# Altium PCB PCB_TechDemo.PcbDoc (part 1 of 2)
Units mm, origin at the board's own origin, x right, y up, seen from the top; angles counter-clockwise.
Board outline 152.4 x 101.6 mm, 2 copper layers (Top Layer, Bottom Layer); 203 components, 210 nets, 892 pads, 0 vias.
Unrouted connection lines stored in the file: 608.
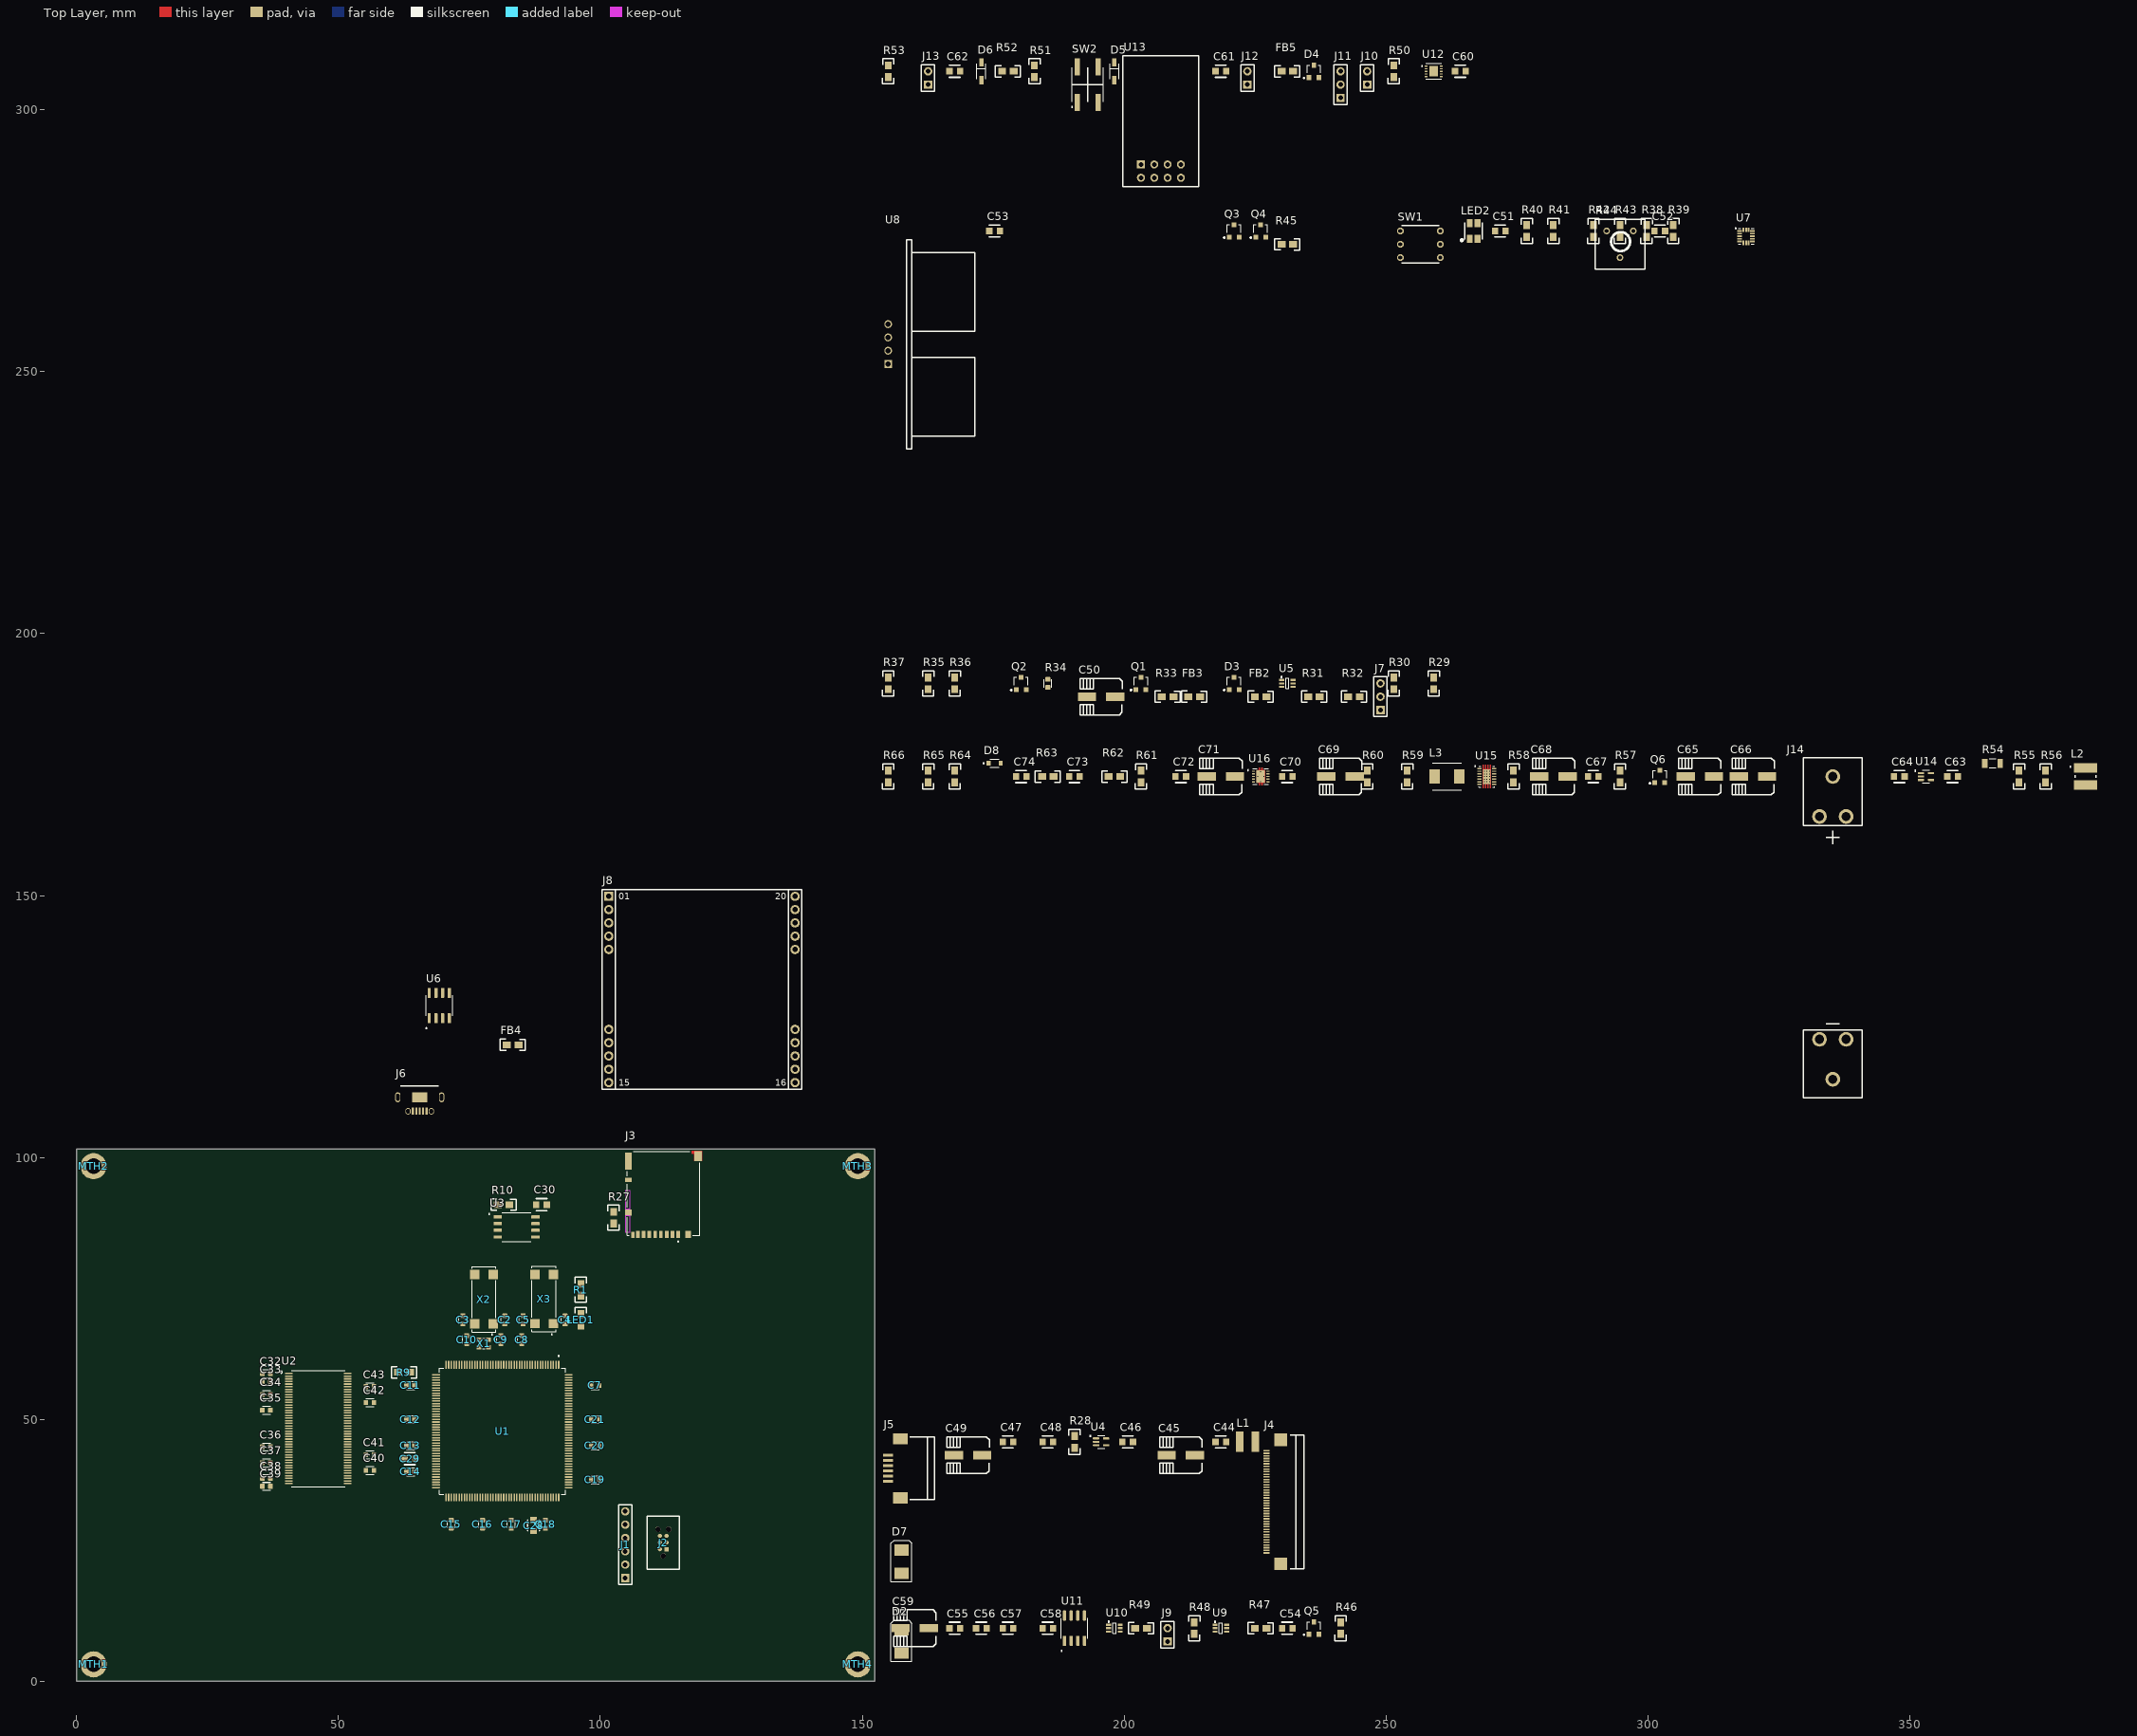
[diagram p0: Top Layer view]
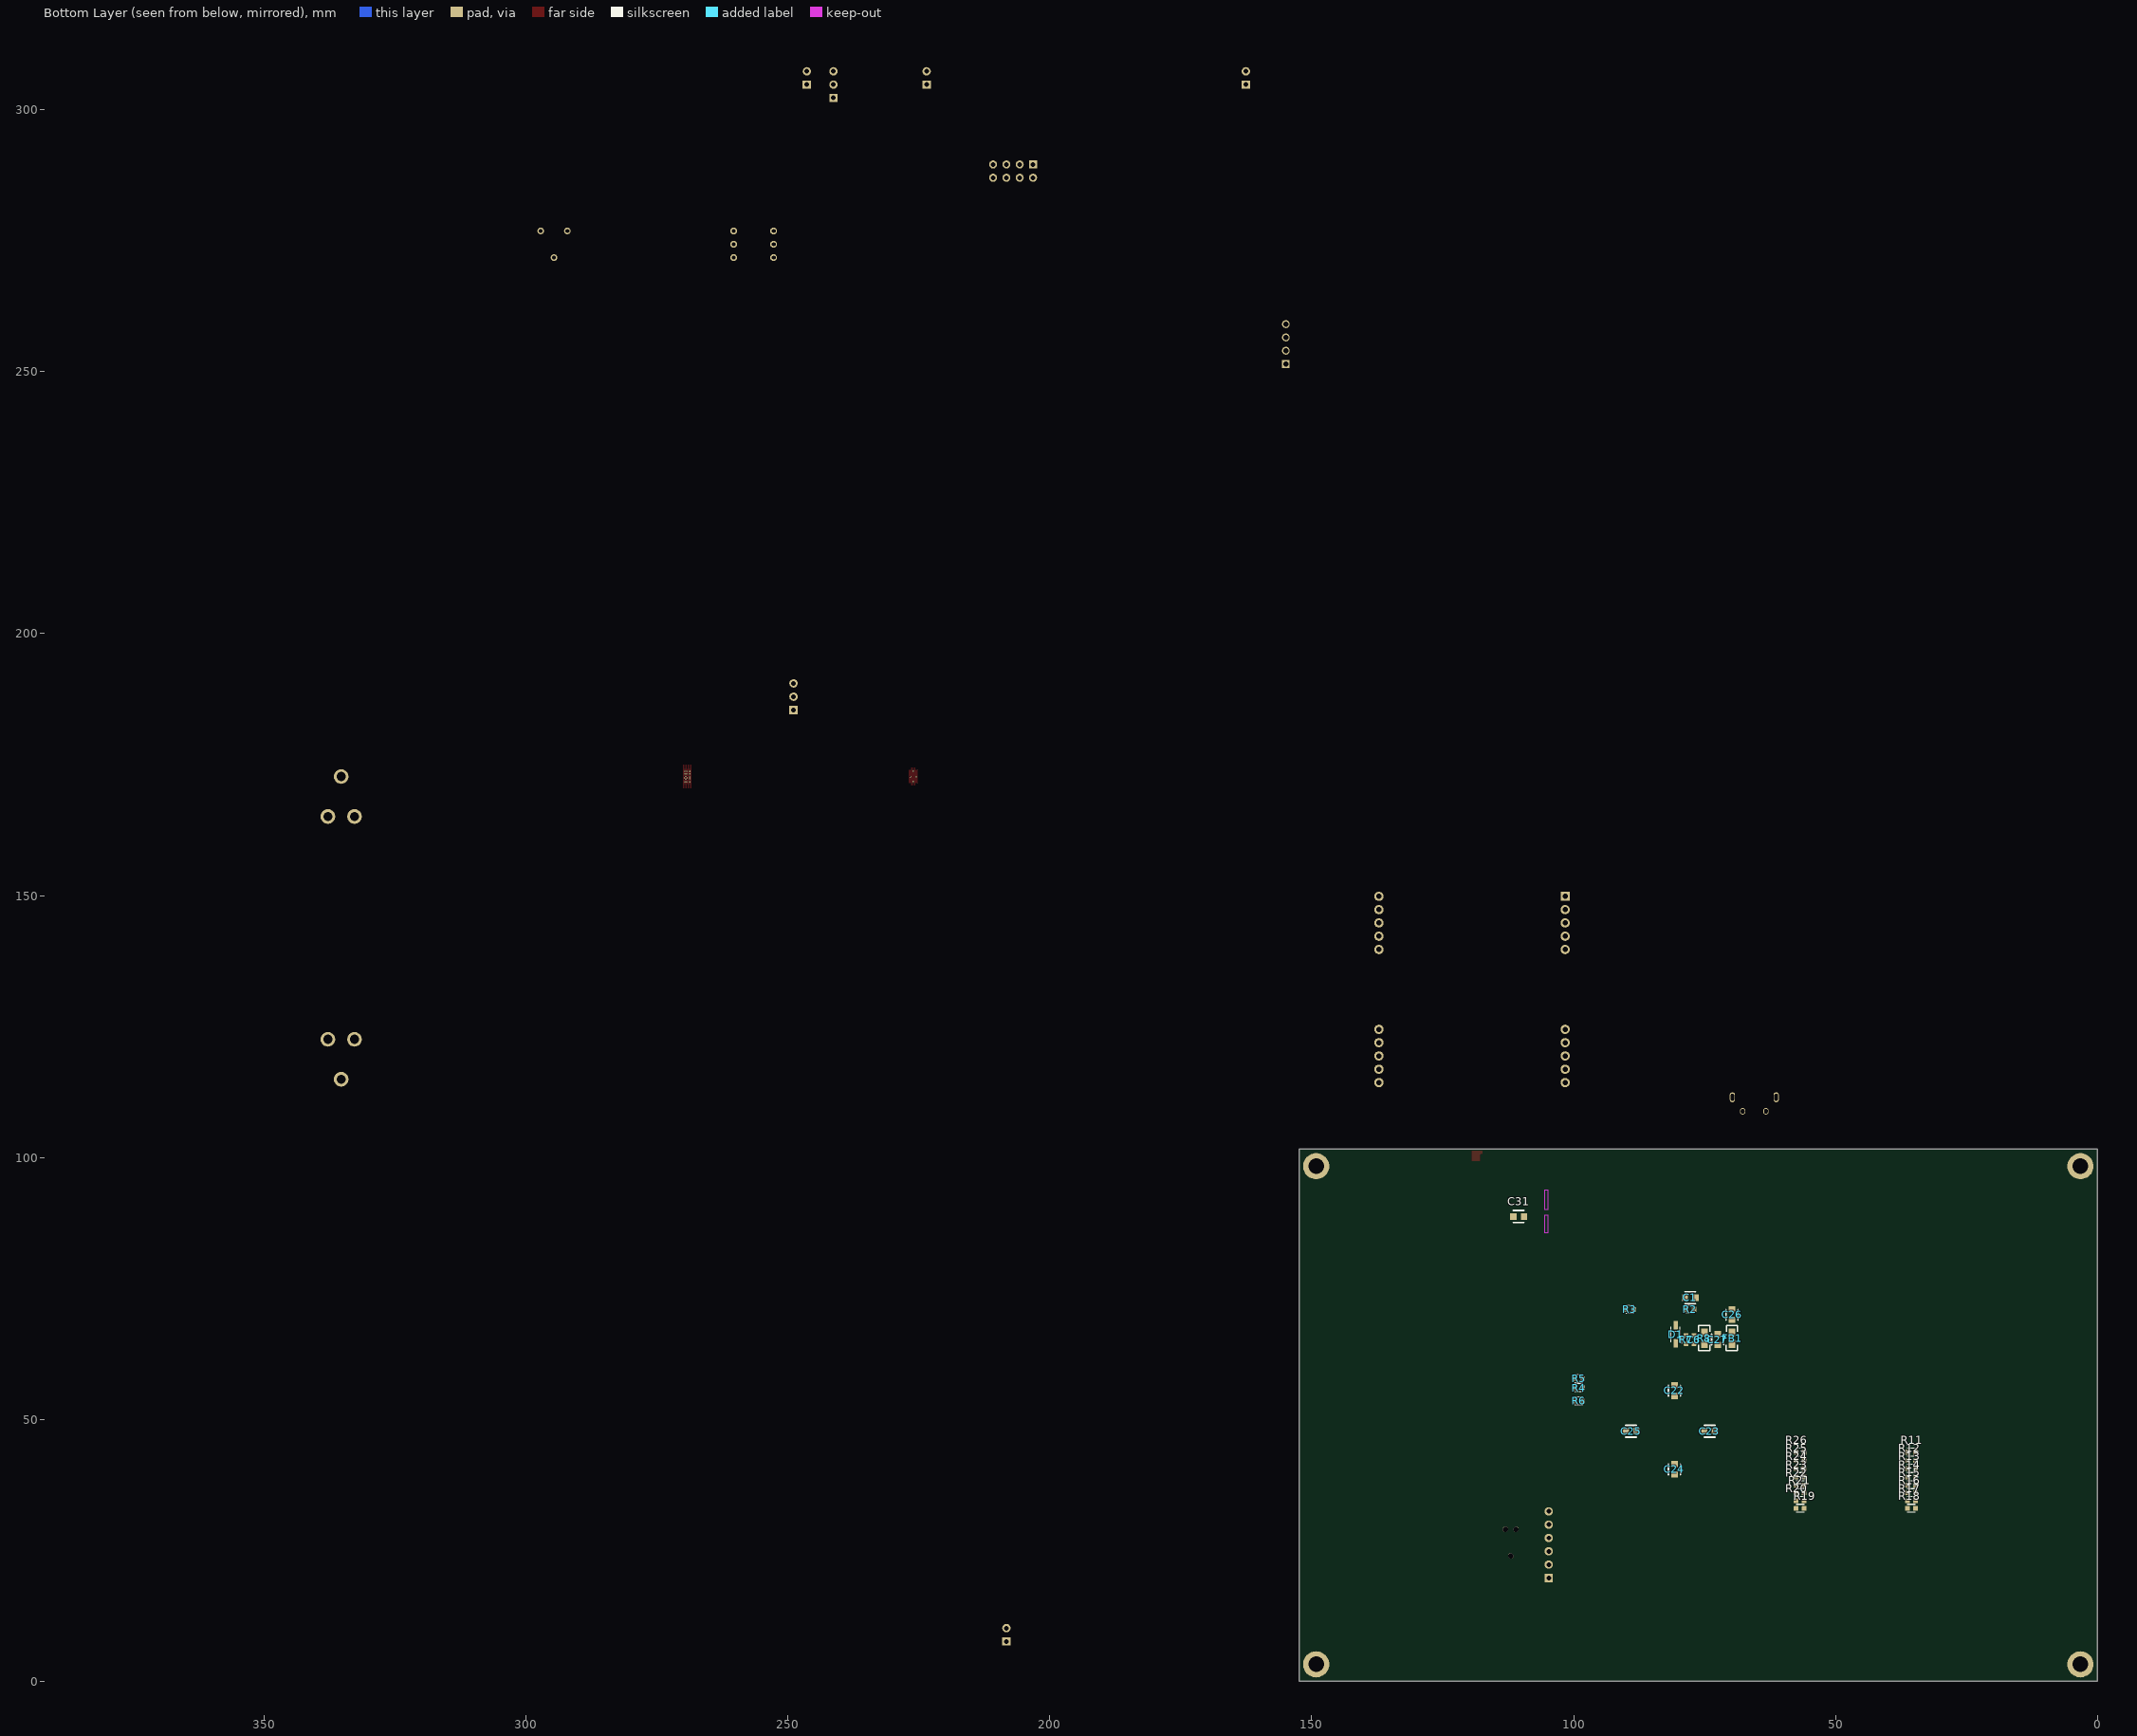
[diagram p1: Bottom Layer view, seen from below]

## Layer stack, top to bottom
Top Solder: solder mask 0.0102, Solder Resist, Dk 3.5
Top Layer: signal copper 0.0356
Dielectric 1: dielectric 0.32, FR-4, Dk 4.8
Bottom Layer: signal copper 0.0356
Bottom Solder: solder mask 0.0102, Solder Resist, Dk 3.5

## Board outline
0,0 152.4,0 152.4,101.6 0,101.6

## Design rules (kind name [scope] priority, off if disabled: settings)
Clearance [All] p1: gap=0.254 ignorepadtopadclearanceinfootprint=FALSE except(0: Arc-Hole Track-Hole SMDPad-Hole THPad-Hole Via-Hole Fill-Hole Poly-Hole Region-Hole Text-Hole)
DiffPairsRouting [All] p1: maxlimit=0.254 minlimit=0.254 mostfreqgap=0.254 toplayer_minwidth=0.381 toplayer_maxwidth=0.381 toplayer_prefwidth=0.381 bottomlayer_minwidth=0.381 bottomlayer_maxwidth=0.381 bottomlayer_prefwidth=0.381 maxuncoupledlength=12.7
MatchedLengths "Schematic Matched Net Lengths_9" [InNet('SDMMC1_CLK')] p1: tolerance=2.54 checknetsindiffpair=FALSE checkdiffpairvsdiffpair=TRUE checkxsignals=TRUE checkothers=TRUE
MatchedLengths "Schematic Matched Net Lengths_8" [InNet('SDMMC1_CMD')] p2: tolerance=2.54 checknetsindiffpair=FALSE checkdiffpairvsdiffpair=TRUE checkxsignals=TRUE checkothers=TRUE
MatchedLengths "Schematic Matched Net Lengths_7" [InNet('QUADSPI_BK1_CLK')] p3: tolerance=2.54 checknetsindiffpair=FALSE checkdiffpairvsdiffpair=TRUE checkxsignals=TRUE checkothers=TRUE
MatchedLengths "Schematic Matched Net Lengths_6" [InNet('QUADSPI_BK1_NCS')] p4: tolerance=2.54 checknetsindiffpair=FALSE checkdiffpairvsdiffpair=TRUE checkxsignals=TRUE checkothers=TRUE
MatchedLengths "Schematic Matched Net Lengths_5" [InNetClass('SDMMC1_D[0..3]')] p5: tolerance=2.54 checknetsindiffpair=FALSE checkdiffpairvsdiffpair=TRUE checkxsignals=TRUE checkothers=TRUE
MatchedLengths "Schematic Matched Net Lengths_3" [InNetClass('QUADSPI_BK1_IO[0..3]')] p6: tolerance=2.54 checknetsindiffpair=FALSE checkdiffpairvsdiffpair=TRUE checkxsignals=TRUE checkothers=TRUE
PolygonConnect [All] p1: connectstyle=Relief reliefconductorwidth=0.254 reliefentries=4 polygonreliefangle="90 Angle" airgapwidth=0.254
RoomDefinition Serial_USB_FS [InComponentClass('Serial_USB_FS')] p1: confinementstyle=ConfineIn formatcopy=TRUE lockcomponents=FALSE outline -25.4,-25.4 25.4,-25.4 25.4,0 -25.4,0
RoomDefinition Serial_DebugPort [InComponentClass('Serial_DebugPort')] p2: confinementstyle=ConfineIn formatcopy=TRUE lockcomponents=FALSE outline -25.4,-25.4 25.4,-25.4 25.4,0 -25.4,0
RoomDefinition Memory_SDRAM [InComponentClass('Memory_SDRAM')] p3: confinementstyle=ConfineIn formatcopy=TRUE lockcomponents=FALSE outline -25.4,-25.4 25.4,-25.4 25.4,0 -25.4,0
RoomDefinition Memory_Quad_SPI_Flash [InComponentClass('Memory_Quad_SPI_Flash')] p4: confinementstyle=ConfineIn formatcopy=TRUE lockcomponents=FALSE outline -25.4,-25.4 25.4,-25.4 25.4,0 -25.4,0
RoomDefinition Memory_MicroSD [InComponentClass('Memory_MicroSD')] p5: confinementstyle=ConfineIn formatcopy=TRUE lockcomponents=FALSE outline -25.4,-25.4 25.4,-25.4 25.4,0 -25.4,0
RoomDefinition VBAT_Monitor [InComponentClass('VBAT_Monitor')] p6: confinementstyle=ConfineIn formatcopy=TRUE lockcomponents=FALSE outline -25.4,-25.4 25.4,-25.4 25.4,0 -25.4,0
RoomDefinition UI_UltraSonic [InComponentClass('UI_UltraSonic')] p7: confinementstyle=ConfineIn formatcopy=TRUE lockcomponents=FALSE outline -25.4,-25.4 25.4,-25.4 25.4,0 -25.4,0
RoomDefinition UI_LED [InComponentClass('UI_LED')] p8: confinementstyle=ConfineIn formatcopy=TRUE lockcomponents=FALSE outline -25.4,-25.4 25.4,-25.4 25.4,0 -25.4,0
RoomDefinition UI_HexSwitch [InComponentClass('UI_HexSwitch')] p9: confinementstyle=ConfineIn formatcopy=TRUE lockcomponents=FALSE outline -25.4,-25.4 25.4,-25.4 25.4,0 -25.4,0
RoomDefinition UI_Accelerometer [InComponentClass('UI_Accelerometer')] p10: confinementstyle=ConfineIn formatcopy=TRUE lockcomponents=FALSE outline -25.4,-25.4 25.4,-25.4 25.4,0 -25.4,0
RoomDefinition Power_5V [InComponentClass('Power_5V')] p11: confinementstyle=ConfineIn formatcopy=TRUE lockcomponents=FALSE outline -25.4,-25.4 25.4,-25.4 25.4,0 -25.4,0
RoomDefinition Power_3V3 [InComponentClass('Power_3V3')] p12: confinementstyle=ConfineIn formatcopy=TRUE lockcomponents=FALSE outline -25.4,-25.4 25.4,-25.4 25.4,0 -25.4,0
RoomDefinition UI_ADC [InComponentClass('UI_ADC')] p13: confinementstyle=ConfineIn formatcopy=TRUE lockcomponents=FALSE outline 27.94,-25.4 78.74,-25.4 78.74,0 27.94,0
RoomDefinition Wifi [InComponentClass('Wifi')] p14: confinementstyle=ConfineIn formatcopy=TRUE lockcomponents=FALSE outline 152.4,284.48 269.24,284.48 269.24,314.96 152.4,314.96
RoomDefinition UserInteractive [InComponentClass('UserInteractive')] p15: confinementstyle=ConfineIn formatcopy=TRUE lockcomponents=FALSE outline 152.4,231.14 322.58,231.14 322.58,284.48 152.4,284.48
RoomDefinition SystemMemory [InComponentClass('SystemMemory')] p16: confinementstyle=ConfineIn formatcopy=TRUE lockcomponents=FALSE outline 152.4,198.12 388.62,198.12 388.62,231.14 152.4,231.14
RoomDefinition SerialInterface [InComponentClass('SerialInterface')] p17: confinementstyle=ConfineIn formatcopy=TRUE lockcomponents=FALSE outline 152.4,180.34 271.78,180.34 271.78,198.12 152.4,198.12
RoomDefinition Power [InComponentClass('Power')] p18: confinementstyle=ConfineIn formatcopy=TRUE lockcomponents=FALSE outline 152.4,109.22 388.62,109.22 388.62,180.34 152.4,180.34
RoomDefinition MainControllerPower [InComponentClass('MainControllerPower')] p19: confinementstyle=ConfineIn formatcopy=TRUE lockcomponents=FALSE outline 152.4,86.36 340.36,86.36 340.36,109.22 152.4,109.22
RoomDefinition MainController [InComponentClass('MainController')] p20: confinementstyle=ConfineIn formatcopy=TRUE lockcomponents=FALSE outline 154.94,53.34 248.92,53.34 248.92,86.36 154.94,86.36
RoomDefinition LCD_TouchBackLight [InComponentClass('LCD_TouchBackLight')] p21: confinementstyle=ConfineIn formatcopy=TRUE lockcomponents=FALSE outline 152.4,17.78 236.22,17.78 236.22,53.34 152.4,53.34
RoomDefinition AudioAmp [InComponentClass('AudioAmp')] p22: confinementstyle=ConfineIn formatcopy=TRUE lockcomponents=FALSE outline 154.94,5.08 246.38,5.08 246.38,17.78 154.94,17.78
RoutingVias [All] p1: holewidth=0.711 width=1.27 viastyle="Through Hole" minholewidth=0.711 minwidth=1.27 maxholewidth=0.711 maxwidth=1.27
SolderMaskExpansion [All] p1: expansion=0.102
Width [All] p1: maxlimit=0.254 minlimit=0.254 preferedwidth=0.254
29 further rules are at their usual default settings.

## Classes and differential pairs
component class Serial_USB_FS: C50 FB2 J6 Q1 Q2 R29 R30 R31 R32 R33 R34 R35 R36 R37 U5 U6
component class Serial_DebugPort: D3 FB3 J7
net class NA_[0..15]: NA_0 NA_1 NA_2 NA_3 NA_4 NA_5 NA_6 NA_7 NA_8 NA_9 NA_10 NA_11 NA_12 NA_13 NA_14 NA_15
component class Memory_SDRAM: C32 C33 C34 C35 C36 C37 C38 C39 C40 C41 C42 C43 R11 R12 R13 R14 R15 R16 R17 R18 R19 R20 R21 R22 R23 R24 R25 R26 U2
component class Memory_Quad_SPI_Flash: C30 R10 U3
component class Memory_MicroSD: C31 J3 R27
component class VBAT_Monitor: C74 D8 R62 R64
component class UI_UltraSonic: C53 U8
component class UI_LED: LED2 Q3 Q4 R38 R39
component class UI_HexSwitch: R40 R41 R42 R43 SW1
component class UI_Accelerometer: C51 R45 U7
component class Power_5V: C69 C70 C71 C72 C73 L3 R59 R60 R61 R63 R65 R66 U16
component class Power_3V3: C64 C65 C66 C67 L2 R55 R56 R57 R58 U15
component class UI_ADC: C52 FB4 R44
net class SDMMC1_D[0..3]: SDMMC1_D0 SDMMC1_D1 SDMMC1_D2 SDMMC1_D3
net class QUADSPI_BK1_IO[0..3]: QUADSPI_BK1_IO0 QUADSPI_BK1_IO1 QUADSPI_BK1_IO2 QUADSPI_BK1_IO3
net class FMC_D[0..15]: FMC_D0 FMC_D1 FMC_D2 FMC_D3 FMC_D4 FMC_D5 FMC_D6 FMC_D7 FMC_D8 FMC_D9 FMC_D10 FMC_D11 FMC_D12 FMC_D13 FMC_D14 FMC_D15
net class FMC_A[0..11]: FMC_A0 FMC_A1 FMC_A2 FMC_A3 FMC_A4 FMC_A5 FMC_A6 FMC_A7 FMC_A8 FMC_A9 FMC_A10 FMC_A11
net class LTDC_R[0..7]: LTDC_R0 LTDC_R1 LTDC_R2 LTDC_R3 LTDC_R4 LTDC_R5 LTDC_R6 LTDC_R7
net class LTDC_G[0..7]: LTDC_G0 LTDC_G1 LTDC_G2 LTDC_G3 LTDC_G4 LTDC_G5 LTDC_G6 LTDC_G7
net class LTDC_B[0..7]: LTDC_B0 LTDC_B1 LTDC_B2 LTDC_B3 LTDC_B4 LTDC_B5 LTDC_B6 LTDC_B7
component class Wifi: C60 C61 C62 D4 D5 D6 FB5 J10 J11 J12 J13 R50 R51 R52 R53 SW2 U12 U13
component class UserInteractive: C51 C52 C53 FB4 J8 LED2 Q3 Q4 R38 R39 R40 R41 R42 R43 R44 R45 SW1 U7 U8
component class SystemMemory: C30 C31 C32 C33 C34 C35 C36 C37 C38 C39 C40 C41 C42 C43 J3 R10 R11 R12 R13 R14 R15 R16 R17 R18 R19 R20 R21 R22 R23 R24 R25 R26 R27 U2 U3
component class SerialInterface: C50 D3 FB2 FB3 J6 J7 Q1 Q2 R29 R30 R31 R32 R33 R34 R35 R36 R37 U5 U6
component class Power: C63 C64 C65 C66 C67 C68 C69 C70 C71 C72 C73 C74 D7 D8 J14 L2 L3 Q6 R54 R55 R56 R57 R58 R59 R60 R61 R62 R63 R64 R65 R66 U14 U15 U16
component class MainController: C1 C2 C3 C4 C5 C6 D1 LED1 R1 R2 R3 R4 R5 R6 R7 U1 X1 X2 X3
component class MainControllerPower: C7 C8 C9 C10 C11 C12 C13 C14 C15 C16 C17 C18 C19 C20 C21 C22 C23 C24 C25 C26 C27 C28 C29 FB1 J1 J2 MTH1 MTH2 MTH3 MTH4 R8 R9
component class LCD_TouchBackLight: C44 C45 C46 C47 C48 C49 D2 J4 J5 L1 R28 U4
component class AudioAmp: C54 C55 C56 C57 C58 C59 J9 Q5 R46 R47 R48 R49 U9 U10 U11
differential pair USB: +USB_P -USB_N
differential pair OTG_FS: +OTG_FS_P -OTG_FS_N

## Components (designator, comment, footprint, x,y, rotation, side; value= is the part's Value field where it differs from the comment)
C1 "UMK212BB7225MG-T" CAP_0805 77.75,73.25 r180 bottom value=2.2uF
C2 "CC0603KRNPO9BN270" CAP_0603 81.75,69 r90 top value=27pF
C3 "CC0603KRNPO9BN270" CAP_0603 73.75,69 r90 top value=27pF
C4 "CC0603CRNPO9BN4R7" CAP_0603 93.25,69 r90 top value=4.7pF
C5 "CC0603CRNPO9BN4R7" CAP_0603 85.25,69 r90 top value=4.7pF
C6 "CC0603KRX7R9BB104" CAP_0603 77.03,65.25 r90 bottom value=0.1uF
C7 "CC0603KRX7R9BB104" CAP_0603 99,56.51 r0 top value=0.1uF
C8 "CC0603KRX7R9BB104" CAP_0603 85,65.25 r90 top value=0.1uF
C9 "CC0603KRX7R9BB104" CAP_0603 81,65.25 r90 top value=0.1uF
C10 "CC0603KRX7R9BB104" CAP_0603 74.5,65.25 r90 top value=0.1uF
C11 "CC0603KRX7R9BB104" CAP_0603 63.75,56.51 r180 top value=0.1uF
C12 "CC0603KRX7R9BB104" CAP_0603 63.75,50.01 r180 top value=0.1uF
C13 "CC0603KRX7R9BB104" CAP_0603 63.75,45.01 r180 top value=0.1uF
C14 "CC0603KRX7R9BB104" CAP_0603 63.75,40.01 r180 top value=0.1uF
C15 "CC0603KRX7R9BB104" CAP_0603 71.53,30 r270 top value=0.1uF
C16 "CC0603KRX7R9BB104" CAP_0603 77.5,30 r270 top value=0.1uF
C17 "CC0603KRX7R9BB104" CAP_0603 83,30 r270 top value=0.1uF
C18 "CC0603KRX7R9BB104" CAP_0603 89.5,30 r270 top value=0.1uF
C19 "CC0603KRX7R9BB104" CAP_0603 99,38.5 r0 top value=0.1uF
C20 "CC0603KRX7R9BB104" CAP_0603 99,45 r0 top value=0.1uF
C21 "CC0603KRX7R9BB104" CAP_0603 99,50 r0 top value=0.1uF
C22 "UMK212BB7225MG-T" CAP_0805 80.75,55.5 r270 bottom value=2.2uF
C23 "UMK212BB7225MG-T" CAP_0805 74.03,47.75 r180 bottom value=2.2uF
C24 "UMK212BB7225MG-T" CAP_0805 80.75,40.5 r90 bottom value=2.2uF
C25 "UMK212BB7225MG-T" CAP_0805 89.03,47.75 r180 bottom value=2.2uF
C26 "UMK212BB7225MG-T" CAP_0805 69.75,70 r90 bottom value=2.2uF
C27 "UMK212BB7225MG-T" CAP_0805 72.5,65.25 r90 bottom value=2.2uF
C28 "UMK212BB7225MG-T" CAP_0805 87.25,29.75 r270 top value=2.2uF
C29 "UMK212BB7225MG-T" CAP_0805 63.612,42.5 r180 top value=2.2uF
C30 "08055C104KAT2A" CAP_0805 88.75,91 r0 top value=0.1uF
C31 "08055C104KAT2A" CAP_0805 110.5,88.75 r180 bottom value=0.1uF
C32 "CC0603KRX7R9BB104" CAP_0603 36.25,58.75 r180 top value=0.1uF
C33 "CC0603KRX7R9BB104" CAP_0603 36.25,57.25 r180 top value=0.1uF
C34 "CC0603KRX7R9BB104" CAP_0603 36.25,54.75 r180 top value=0.1uF
C35 "CC0603KRX7R9BB104" CAP_0603 36.25,51.75 r180 top value=0.1uF
C36 "CC0603KRX7R9BB104" CAP_0603 36.25,44.75 r180 top value=0.1uF
C37 "CC0603KRX7R9BB104" CAP_0603 36.25,41.75 r180 top value=0.1uF
C38 "CC0603KRX7R9BB104" CAP_0603 36.25,38.75 r180 top value=0.1uF
C39 "CC0603KRX7R9BB104" CAP_0603 36.25,37.25 r180 top value=0.1uF
C40 "CC0603KRX7R9BB104" CAP_0603 56,40.25 r0 top value=0.1uF
C41 "CC0603KRX7R9BB104" CAP_0603 56,43.25 r0 top value=0.1uF
C42 "CC0603KRX7R9BB104" CAP_0603 56,53.25 r0 top value=0.1uF
C43 "CC0603KRX7R9BB104" CAP_0603 56,56.25 r0 top value=0.1uF
C44 "08055C104KAT2A" CAP_0805 218.44,45.72 r0 top value=0.1uF
C45 "UZS1C220MCL1GB" CAP_ALE_SMD_6.6x6.6 210.82,43.18 r0 top net-tie value=22uF
C46 "UMK212B7105MGHT" CAP_0805 200.66,45.72 r0 top value=1.0uF
C47 "08055C104KAT2A" CAP_0805 177.8,45.72 r0 top value=0.1uF
C48 "08055C104KAT2A" CAP_0805 185.42,45.72 r0 top value=0.1uF
C49 "UZS1C220MCL1GB" CAP_ALE_SMD_6.6x6.6 170.18,43.18 r0 top net-tie value=22uF
C50 "UZS1C220MCL1GB" CAP_ALE_SMD_6.6x6.6 195.58,187.96 r0 top net-tie value=22uF
C51 "08055C104KAT2A" CAP_0805 271.78,276.86 r0 top value=0.1uF
C52 "08055C104KAT2A" CAP_0805 302.26,276.86 r0 top value=0.1uF
C53 "08055C104KAT2A" CAP_0805 175.26,276.86 r0 top value=0.1uF
C54 "UMK212BB7225MG-T" CAP_0805 231.14,10.16 r0 top value=2.2uF
C55 "UMK212B7105MGHT" CAP_0805 167.64,10.16 r0 top value=1.0uF
C56 "08055C104KAT2A" CAP_0805 172.72,10.16 r0 top value=0.1uF
C57 "08055C104KAT2A" CAP_0805 177.8,10.16 r0 top value=0.1uF
C58 "08055C104KAT2A" CAP_0805 185.42,10.16 r0 top value=0.1uF
C59 "UZS1C220MCL1GB" CAP_ALE_SMD_6.6x6.6 160.02,10.16 r0 top net-tie value=22uF
C60 "08055C104KAT2A" CAP_0805 264.16,307.34 r0 top value=0.1uF
C61 "UMK212BB7225MG-T" CAP_0805 218.44,307.34 r0 top value=2.2uF
C62 "UMK212BB7225MG-T" CAP_0805 167.64,307.34 r0 top value=2.2uF
C63 "UMK212BB7225MG-T" CAP_0805 358.14,172.72 r0 top value=2.2uF
C64 "08055C104KAT2A" CAP_0805 347.98,172.72 r0 top value=0.1uF
C65 "UZS1C220MCL1GB" CAP_ALE_SMD_6.6x6.6 309.88,172.72 r0 top net-tie value=22uF
C66 "UCL1C470MCL6GS" CAP_ALE_SMD_6.6x6.6 320.04,172.72 r0 top net-tie value=47uF
C67 "08055C104KAT2A" CAP_0805 289.56,172.72 r0 top value=0.1uF
C68 "UZS1C220MCL1GB" CAP_ALE_SMD_6.6x6.6 281.94,172.72 r0 top net-tie value=22uF
C69 "UZS1C220MCL1GB" CAP_ALE_SMD_6.6x6.6 241.3,172.72 r0 top net-tie value=22uF
C70 "08055C104KAT2A" CAP_0805 231.14,172.72 r0 top value=0.1uF
C71 "UZS1C220MCL1GB" CAP_ALE_SMD_6.6x6.6 218.44,172.72 r0 top net-tie value=22uF
C72 "CML0805C0G180JT50V" CAP_0805 210.82,172.72 r0 top value=18pF
C73 "CC0805KRX7R9BB183" CAP_0805 190.5,172.72 r0 top value=18nF
C74 "08055C104KAT2A" CAP_0805 180.34,172.72 r0 top value=0.1uF
D1 "1N4148W-7-F" SOD123 80.5,66.25 r90 bottom value=100V
D2 "MBRS2040LT3G" SMB 157.48,7.62 r90 top value=40V
D3 "GSOT03C-G3-08" SOT-23 220.98,190.5 r0 top value=3.3V
D4 "GSOT03C-G3-08" SOT-23 236.22,307.34 r0 top value=3.3V
D5 "1N4148W-7-F" SOD123 198.12,307.34 r90 top value=100V
D6 "1N4148W-7-F" SOD123 172.72,307.34 r90 top value=100V
D7 "MBRS2040LT3G" SMB 157.48,22.86 r90 top value=40V
D8 "MMSZ5227BS-7-F" SOD323 175.26,175.26 r0 top value=3.6V
FB1 "BLM21AG102SN1D" RES_0805#1 69.75,65.5 r270 top value=200mA
FB2 "BLM21AG102SN1D" RES_0805#2 226.06,187.96 r0 top value=200mA
FB3 "BLM21AG102SN1D" RES_0805#2 213.36,187.96 r0 top value=200mA
FB4 "BLM21AG102SN1D" RES_0805#2 83.25,121.5 r180 top value=200mA
FB5 "BLM21AG102SN1D" RES_0805#2 231.14,307.34 r0 top value=200mA
J1 "PREC006SFAN-RC" HDR_1X6_100MILL 104.75,19.75 r90 top
J2 "CONN_TC_TC2030-MCP-NL" TC2030-MCP-NL- 112,26.5 r90 top
J3 "DM3BT-DSF-PEJS" HRS_DM3BT-DSF-PEJS 112,92.75 r180 top
J4 "0541044033" "CONN_MOLEX_ 0541044033" 227.172,44.03 r90 top value="DISPLAY CONNECT"
J5 "0522710679" CONN_MOLEX_0522710679 154.94,43.18 r90 top value="TOUCH CONNECT"
J6 "0475900001" MICRO_USB_AB_MOLEX_0475900001 61.325,111.5 r180 top value="MICRO USB AB"
J7 "PREC003SFAN-RC" HDR_1X3_100MILL 248.92,185.42 r90 top
J8 "PPTC151LFBN-RC" CONN_EXPANSION_BOARD 101.6,149.86 r0 top value=x4
J9 "PREC002SFAN-RC" HDR_1X2_100MILL 208.28,7.62 r90 top
J10 "PREC002SFAN-RC" HDR_1X2_100MILL 246.38,304.8 r90 top
J11 "PREC003SFAN-RC" HDR_1X3_100MILL 241.3,302.26 r90 top
J12 "PREC002SFAN-RC" HDR_1X2_100MILL 223.52,304.8 r90 top
J13 "PREC002SFAN-RC" HDR_1X2_100MILL 162.56,304.8 r90 top
J14 "54" CONN_BATTERY_18650 335.28,172.72 r0 top value=18650
L1 "LPS4018-472MRC" LPS4018 223.52,45.72 r0 top value=4.7uH
L2 "SDR0403-1R0ML" IND_SDR0403 383.54,172.72 r0 top value=1uH
L3 "IHLP2020BZER1R0M01" INDPM5552X200N 261.62,172.72 r0 top value=1uH
LED1 "LTST-C170GKT" PMG_LTST-C170GKT 96.25,69 r90 bottom value="2.1V / 10mA"
LED2 "HSMF-A201-A00J1" 4PLCC-LED 266.7,276.86 r0 top value=2.2V
MTH1 "MOUNT_HOLE_3MM_ID" MT_HOLE_3MM_5MM 3.25,3.25 r0 top
MTH2 "MOUNT_HOLE_3MM_ID" MT_HOLE_3MM_5MM 3.25,98.35 r0 top
MTH3 "MOUNT_HOLE_3MM_ID" MT_HOLE_3MM_5MM 149.15,98.35 r0 top
MTH4 "MOUNT_HOLE_3MM_ID" MT_HOLE_3MM_5MM 149.15,3.25 r0 top
Q1 "IRLML5103PBF" SOT-23 203.2,190.5 r0 top value=30V
Q2 "2N7002-7-F" SOT-23 180.34,190.5 r0 top value=60V
Q3 "2N7002-7-F" SOT-23 220.98,276.86 r0 top value=60V
Q4 "2N7002-7-F" SOT-23 226.06,276.86 r0 top value=60V
Q5 "2N7002-7-F" SOT-23 236.22,10.16 r0 top value=60V
Q6 "NTR3A30PZT1G" SOT-23 302.26,172.72 r0 top value=20V
R1 "RC0805FR-07200RL" RES_0805#2 96.25,74.75 r270 top value=200
R2 "RC0603FR-071ML" RES_0603#1 77.75,71.008 r180 bottom value=1M
R3 "RC0603FR-071ML" RES_0603#1 89.25,71 r180 bottom value=1M
R4 "RC0603FR-0710KL" RES_0603#1 99,56 r180 bottom value=10K
R5 "RC0603FR-0710KL" RES_0603#1 99,57.75 r180 bottom value=10K
R6 "RC0603FR-07100KL" RES_0603#1 99,53.5 r180 bottom value=100K
R7 "RC0603FR-07100KL" RES_0603#1 78.52,65.25 r270 bottom value=100K
R8 "RC0805JR-070RL" PMG_RES_0805 75.038,65.5 r270 bottom value=0
R9 "RC0805JR-070RL" RES_0805#2 62.5,59 r0 top value=0
R10 "SG73S2ATTD1002F" PMG_RES_0805 81.5,91 r0 top value=10K
R11 "RC0603FR-07100KL" RES_0603#1 35.5,43.75 r0 bottom value=100K
R12 "RC0603FR-07100KL" RES_0603#1 35.5,42.173 r0 bottom value=100K
R13 "RC0603FR-07100KL" RES_0603#1 35.5,40.632 r0 bottom value=100K
R14 "RC0603FR-07100KL" RES_0603#1 35.5,39.034 r0 bottom value=100K
R15 "RC0603FR-07100KL" RES_0603#1 35.5,37.5 r0 bottom value=100K
R16 "RC0603FR-07100KL" RES_0603#1 35.5,36 r0 bottom value=100K
R17 "RC0603FR-07100KL" RES_0603#1 35.5,34.5 r0 bottom value=100K
R18 "RC0603FR-07100KL" RES_0603#1 35.5,33 r0 bottom value=100K
R19 "RC0603FR-07100KL" RES_0603#2 56.75,33 r180 top value=100K
R20 "RC0603FR-07100KL" RES_0603#1 56.75,34.5 r180 bottom value=100K
R21 "RC0603FR-07100KL" RES_0603#1 56.75,36 r180 bottom value=100K
R22 "RC0603FR-07100KL" RES_0603#1 56.75,37.5 r180 bottom value=100K
R23 "RC0603FR-07100KL" RES_0603#1 56.75,39.034 r180 bottom value=100K
R24 "RC0603FR-07100KL" RES_0603#1 56.75,40.632 r180 bottom value=100K
R25 "RC0603FR-07100KL" RES_0603#1 56.75,42.173 r180 bottom value=100K
R26 "RC0603FR-07100KL" RES_0603#1 56.75,43.75 r180 bottom value=100K
R27 "RK73H2ATTD1003F" PMG_RES_0805 102.5,88.5 r270 top value=100K
R28 "RK73H2ATTD5R10F" PMG_RES_0805 190.5,45.72 r90 top value=5.1
R29 "RC0805JR-070RL" PMG_RES_0805 259.08,190.5 r90 top value=0
R30 "RC0805JR-070RL" PMG_RES_0805 251.46,190.5 r90 top value=0
R31 "RC0805FR-0715KL" RES_0805#2 236.22,187.96 r0 top value=15K
R32 "RC0805FR-0715KL" RES_0805#2 243.84,187.96 r0 top value=15K
R33 "RC0805FR-071KL" RES_0805#2 208.28,187.96 r0 top value=1K
R34 "RC0603FR-0710KL" RES_0603#1 185.42,190.5 r90 top value=10K
R35 "RK73H2ATTD1003F" PMG_RES_0805 162.56,190.5 r90 top value=100K
R36 "RK73H2ATTD1003F" PMG_RES_0805 167.64,190.5 r90 top value=100K
R37 "RK73H2ATTD1003F" PMG_RES_0805 154.94,190.5 r90 top value=100K
R38 "RK73H2ATTD1200F" PMG_RES_0805 299.72,276.86 r90 top value=120
R39 "RK73H2ATTD1200F" PMG_RES_0805 304.8,276.86 r90 top value=120
R40 "RK73H2ATTD1003F" PMG_RES_0805 276.86,276.86 r90 top value=100K
R41 "RK73H2ATTD1003F" PMG_RES_0805 281.94,276.86 r90 top value=100K
R42 "RK73H2ATTD1003F" PMG_RES_0805 289.56,276.86 r90 top value=100K
R43 "RK73H2ATTD1003F" PMG_RES_0805 294.64,276.86 r90 top value=100K
R44 "3386F-1-103TLF" BOURNS_3386F 294.64,274.32 r0 top value=10K
R45 "SG73S2ATTD1002F" RES_0805#2 231.14,274.32 r0 top value=10K
R46 "RK73H2ATTD1003F" PMG_RES_0805 241.3,10.16 r90 top value=100K
R47 "SG73S2ATTD1002F" RES_0805#2 226.06,10.16 r0 top value=10K
R48 "RK73H2ATTD1003F" PMG_RES_0805 213.36,10.16 r90 top value=100K
R49 "SG73S2ATTD1002F" RES_0805#2 203.2,10.16 r0 top value=10K
R50 "RK73H2ATTD1003F" PMG_RES_0805 251.46,307.34 r90 top value=100K
R51 "RK73H2ATTD1003F" PMG_RES_0805 182.88,307.34 r90 top value=100K
R52 "SG73S2ATTD1002F" RES_0805#2 177.8,307.34 r0 top value=10K
R53 "RK73H2ATTD1003F" PMG_RES_0805 154.94,307.34 r90 top value=100K
R54 "RL1206FR-070R14L" 1206 365.76,175.26 r0 top value=0.140
R55 "RC0805JR-070RL" PMG_RES_0805 370.84,172.72 r90 top value=0
R56 "RC0805JR-070RL" PMG_RES_0805 375.92,172.72 r90 top value=0
R57 "RC0805FR-07768KL" PMG_RES_0805 294.64,172.72 r90 top value=768K
R58 "RC0805FR-07137KL" PMG_RES_0805 274.32,172.72 r90 top value=137K
R59 "RC0805JR-070RL" PMG_RES_0805 254,172.72 r90 top value=0
R60 "RC0805JR-070RL" PMG_RES_0805 246.38,172.72 r90 top value=0
R61 "RK73H2ATTD1003F" PMG_RES_0805 203.2,172.72 r90 top value=100K
R62 "RC0805FR-0740K2L" RES_0805#2 198.12,172.72 r0 top value=40.2K
R63 "RC0805FR-07402KL" RES_0805#2 185.42,172.72 r0 top value=402K
R64 "RK73H2ATTD1003F" PMG_RES_0805 167.64,172.72 r90 top value=100K
R65 "RK73H2ATTD1003F" PMG_RES_0805 162.56,172.72 r90 top value=100K
R66 "RK73H2ATTD1003F" PMG_RES_0805 154.94,172.72 r90 top value=100K
SW1 "220ADC16" CTS_220ADC16 256.54,274.32 r0 top value=HEX
SW2 "EVQ-Q2U02W" SW_EVQ-Q2U02W 193.04,304.8 r90 top value=15V
U1 "STM32F746IGT6" QFP50P2600X2600X160-176N 81.28,47.76 r270 top value="216MHz 1MB"
U2 "IS42S32400F-6TL-TR" 86TSOPII 46.13,48.25 r0 top value=4Mx32
U3 "MT25QL128ABA1ESE-0SIT" SO8W 84,86.75 r0 top
U4 "TPS61169DCKR" SC70-5_SOT-353_5-TSSOP 195.58,45.72 r0 top value=1.8A
U5 "RCLAMP0504FATCT" SOT-363_6-TSSOP_SC-88 231.14,190.5 r0 top value=5V
U6 "STMPS2141MTR" SO-8 69.25,129 r90 top value=500mA
U7 "LIS3DHTR" XDCR_LIS3DHTR 317.5,276.86 r0 top value="X Y Z 16g"
U8 "4007" 4007 154.94,251.46 r90 top value=3V
U9 "TPL0401A-10DCKR" SOT-363_6-TSSOP_SC-88 218.44,10.16 r0 top value=10K
U10 "TSV620ILT" SOT-363_6-TSSOP_SC-88 198.12,10.16 r0 top value="GBP 420KHz"
U11 "LM4861MX/NOPB" SO-8 190.5,10.16 r90 top value="CLASS AB 1.5W"
U12 "NX3DV221TKX" PMG_NX3DV221TKX 259.08,307.34 r0 top
U13 "WRL-17146" WRL-17146 203.2,289.56 r90 top value=4MB
U14 "MCP73826-4.1VCHTR" SC70-5_SOT-353_5-TSSOP 353.06,172.72 r0 top value=4.1V
U15 "TPS63020DSJR" 14VSON 269.24,172.72 r0 top value=3.5A
U16 "TPS61230DRCR" 10VSON 226.06,172.72 r0 top value=4A
X1 "ECS-2520MVLC-250-BN-TR" OSC_ECS-2520S25-250-FN-TR 77.75,64.5 r180 top value=25MHz
X2 "ECS-250-18-7SX-TR" XTAL_ECS 77.78,72.95 r90 top value=25MHz
X3 "MC-306 32.7680K-E0:PURE SN" XTAL_ECS 89.25,73 r90 top value=32.768KHZ

## Footprints (in the part's own frame and the unit in brackets; to place one, negate y for a bottom-side part, rotate by r counter-clockwise, add the part's x,y. Pads: shape width x height; smd on the part's side, far side on the other; paste and mask are expansions set on the pad)
4PLCC-LED [mm] "HSMF-A201"
  rect 1.1x1.5 smd: 1(-0.75,-1.5) 2(-0.75,1.5) 3(0.75,1.5) 4(0.75,-1.5)
  silkscreen extent -2.4,-1.9 1.7,1.6, body extent -1.35,-1.6 1.35,1.6, height 1.1
10VSON [mm] "IC PACKAGE TPS61230DRCR"
  rrect25% 0.6x0.24 smd mask+0: 1(-1.4,1) 2(-1.4,0.5) 3(-1.4,0) 4(-1.4,-0.5) 5(-1.4,-1) 6(1.4,-1) 7(1.4,-0.5) 8(1.4,0) 9(1.4,0.5) 10(1.4,1)
  rrect5% 1.65x2.4 smd paste-2 mask+0: 11(0,0)
  round 0.3 hole 0.2 mask+0: 12(0,-0.95) 13(-0.575,0) 14(0.575,0) 15(0,0.95)
  Top Layer region: 0.375,1.2 0.825,1.2 0.825,-1.2 0.375,-1.2 0.375,-1.7 0.125,-1.7 0.125,-1.2 -0.125,-1.2 -0.125,-1.7 -0.375,-1.7 -0.375,-1.2 -0.825,-1.2 -0.825,1.2 -0.375,1.2 -0.375,1.7 -0.125,1.7 -0.125,1.2 0.125,1.2 0.125,1.7 0.375,1.7
  silkscreen extent -2.49,-1.5 1.5,1.5, body extent -1.5,-1.5 1.5,1.5, height 1
14VSON [mm] "IC PACKAGE TPS63020DSJR"
  rect 0.8x0.24 smd: 1(-1.4,1.5) 2(-1.4,1) 3(-1.4,0.5) 4(-1.4,0) 5(-1.4,-0.5) 6(-1.4,-1) 7(-1.4,-1.5) 8(1.4,-1.5) 9(1.4,-1) 10(1.4,-0.5) 11(1.4,0) 12(1.4,0.5) 13(1.4,1) 14(1.4,1.5)
  rect 1.5x2.8 smd paste-2 mask+0: 15(0,0)
  round 0.3 hole 0.2: 16(-0.5,1) 17(0,1) 18(0.5,1) 19(-0.5,0.5) 20(0,0.5) 21(0.5,0.5) 22(-0.5,0) 23(0,0) 24(0.5,0) 25(-0.5,-0.5) 26(0,-0.5) 27(0.5,-0.5) 28(-0.5,-1) 29(0,-1) 30(0.5,-1)
  Top Layer region: 0.79,-2.2 0.59,-2.2 0.59,-1.425 0.33,-1.425 0.33,-2.2 0.13,-2.2 0.13,-1.425 -0.13,-1.425 -0.13,-2.2 -0.33,-2.2 -0.33,-1.425 -0.59,-1.425 -0.59,-2.2 -0.79,-2.2 -0.79,2.2 -0.59,2.2 -0.59,1.425 -0.33,1.425 -0.33,2.2 -0.13,2.2 -0.13,1.425 0.13,1.425 0.13,2.2 0.33,2.2 0.33,1.425 0.59,1.425 0.59,2.2 0.79,2.2
  silkscreen extent -2.35,-2 1.5,2.1, body extent -1.59,-2.08 1.59,2.08, height 1
86TSOPII [mm] "SOP50P1176X120-86N"
  rrect25% 1.44x0.28 smd: 1(-5.62,10.5) 2(-5.62,10) 3(-5.62,9.5) 4(-5.62,9) 5(-5.62,8.5) 6(-5.62,8) 7(-5.62,7.5) 8(-5.62,7) 9(-5.62,6.5) 10(-5.62,6) 11(-5.62,5.5) 12(-5.62,5) 13(-5.62,4.5) 14(-5.62,4) 15(-5.62,3.5) 16(-5.62,3) 17(-5.62,2.5) 18(-5.62,2) 19(-5.62,1.5) 20(-5.62,1) 21(-5.62,0.5) 22(-5.62,0) 23(-5.62,-0.5) 24(-5.62,-1) 25(-5.62,-1.5) 26(-5.62,-2) 27(-5.62,-2.5) 28(-5.62,-3) 29(-5.62,-3.5) 30(-5.62,-4) 31(-5.62,-4.5) 32(-5.62,-5) 33(-5.62,-5.5) 34(-5.62,-6) 35(-5.62,-6.5) 36(-5.62,-7) 37(-5.62,-7.5) 38(-5.62,-8) 39(-5.62,-8.5) 40(-5.62,-9) 41(-5.62,-9.5) 42(-5.62,-10) 43(-5.62,-10.5) 44(5.62,-10.5) 45(5.62,-10) 46(5.62,-9.5) 47(5.62,-9) 48(5.62,-8.5) 49(5.62,-8) 50(5.62,-7.5) 51(5.62,-7) 52(5.62,-6.5) 53(5.62,-6) 54(5.62,-5.5) 55(5.62,-5) 56(5.62,-4.5) 57(5.62,-4) 58(5.62,-3.5) 59(5.62,-3) 60(5.62,-2.5) 61(5.62,-2) 62(5.62,-1.5) 63(5.62,-1) 64(5.62,-0.5) 65(5.62,0) 66(5.62,0.5) 67(5.62,1) 68(5.62,1.5) 69(5.62,2) 70(5.62,2.5) 71(5.62,3) 72(5.62,3.5) 73(5.62,4) 74(5.62,4.5) 75(5.62,5) 76(5.62,5.5) 77(5.62,6) 78(5.62,6.5) 79(5.62,7) 80(5.62,7.5) 81(5.62,8) 82(5.62,8.5) 83(5.62,9) 84(5.62,9.5) 85(5.62,10) 86(5.62,10.5)
  silkscreen extent -7.26,-11.11 5.08,11.11, body extent -5.9,-11.11 5.9,11.11, height 1
1206 [mm] "1206 PACKAGE"
  rect 1.05x1.72 smd: 1(-1.46,0) 2(1.46,0)
  silkscreen extent -0.62,-0.85 0.62,0.85, body extent -1.6,-0.8 1.6,0.8, height 0.6
4007 [mm] "RCWL-1601 ULTRA SONIC SENSOR"
  rect 1.5x1.5 hole 1: 1(0,0)
  round 1.5 hole 1: 2(2.54,0) 3(5.08,0) 4(7.62,0)
  silkscreen extent -16.25,-16.5 23.75,-3.5, body extent -18.6,-17.4 26,0.34, height 20.85
BOURNS_3386F [mil] "RESISTOR POT 3386F SERIES"
  round 50 hole 30: 1(100,100) 2(0,-100) 3(-100,100)
  silkscreen extent -188,-188 188,188, body extent -188,-192 189,195, height 415
CAP_0603 [mm] "CAP 0603 50V"
  rrect22% 0.89x0.93 smd: 1(-0.77,0) 2(0.77,0)
  silkscreen extent -0.76,-0.76 0.76,0.76, body extent -0.8,-0.4 0.8,0.41, height 0.85
CAP_0805 [mm]
  rect 1.2x1.27 smd: 1(-1.008,0.003) 2(1.008,-0.003)
  silkscreen extent -1.02,-1.15 1.01,1.14, body extent -1.05,-0.63 0.95,0.62, height 1.26
CAP_ALE_SMD_6.6x6.6 [mm] "CAP_ALE BODY SIZE 6.6mm x 6.6mm 3.9mm Tall"
  rect 3.5x1.6 smd: 1(2.7,0) 2(-2.7,0)
  silkscreen extent -4,-3.5 4.06,3.5, body extent -3.52,-3.3 3.48,3.3, height 3.91
CONN_BATTERY_18650 [mil] "BATTERY CONNECTOR 18650 MADE OF 2X KEYSTONE 54"
  round 110 hole 70: 1(-100,-300) 1(0,0) 1(100,-300) 2(-100,-1974.88) 2(0,-2274.88) 2(100,-1974.88)
  silkscreen extent -220,-2415 220,140, body extent -356,-2417 356,142, height 724
CONN_EXPANSION_BOARD [mil] "EXPANSION BOARD CONNECTOR 30 PIN 100 MIL SPACING"
  rect 70x70 hole 40: 1(0,0)
  round 70 hole 40: 2(0,-100) 3(0,-200) 4(0,-300) 5(0,-400) 6(0,-1000) 7(0,-1100) 8(0,-1200) 9(0,-1300) 10(0,-1400) 11(1400,-1400) 12(1400,-1300) 13(1400,-1200) 14(1400,-1100) 15(1400,-1000) 16(1400,-400) 17(1400,-300) 18(1400,-200) 19(1400,-100) 20(1400,0)
  silkscreen extent -50,-1450 1450,50, body extent -50,-1460 1450,60, height 335
CONN_MOLEX_0522710679 [mm] "MOLEX 0522710679 NEW HAVEN TOUCH"
  rect 0.6x1.9 smd: 1(-5,0) 2(-4,0) 3(-3,0) 4(-2,0) 5(-1,0) 6(0,0)
  rect 2.1x2.8 smd: 7(3.15,-2.35) 8(-8.15,-2.35)
  silkscreen extent -8.5,-8.83 3.5,-4.18, body extent -9,-7.4 4,0, height 3
"CONN_MOLEX_ 0541044033" [mm] "MOLEX 0541044033 RGB888 NEW HAVEN CONNECTOR"
  rect 0.3x1.2 smd: 1(0,0) 2(-0.5,0) 3(-1,0) 4(-1.5,0) 5(-2,0) 6(-2.5,0) 7(-3,0) 8(-3.5,0) 9(-4,0) 10(-4.5,0) 11(-5,0) 12(-5.5,0) 13(-6,0) 14(-6.5,0) 15(-7,0) 16(-7.5,0) 17(-8,0) 18(-8.5,0) 19(-9,0) 20(-9.5,0) 21(-10,0) 22(-10.5,0) 23(-11,0) 24(-11.5,0) 25(-12,0) 26(-12.5,0) 27(-13,0) 28(-13.5,0) 29(-14,0) 30(-14.5,0) 31(-15,0) 32(-15.5,0) 33(-16,0) 34(-16.5,0) 35(-17,0) 36(-17.5,0) 37(-18,0) 38(-18.5,0) 39(-19,0) 40(-19.5,0)
  rect 2.4x2.4 smd: 41(2.1,-2.7) 42(-21.6,-2.7)
  silkscreen extent -22.5,-7.15 3,-4.5, body extent -22.5,-5.5 3,0.1, height 2.05
CTS_220ADC16 [mm] "HEX ROTARY SWITCH"
  round 1.3 hole 0.8: 1(-3.81,2.54) 2(3.81,-2.54) 4(-3.81,-2.54) 8(3.81,2.54) C1(-3.81,0) C2(3.81,0)
  silkscreen extent -3.6,-3.6 3.6,3.6, body extent -3.59,-3.6 3.61,3.6, height 8.15
HDR_1X2_100MILL [mm] "SINGLE ROW 2 PIN HDR 2.54MM"
  rect 1.6x1.6 hole 0.9: 1(0,0)
  round 1.6 hole 0.9: 2(2.54,0)
  silkscreen extent -1.27,-1.27 3.81,1.27, body extent -1.27,-1.27 3.81,1.27, height 8.62
HDR_1X3_100MILL [mm] "SINGLE ROW 3 PIN HDR 2.54MM"
  rect 1.6x1.6 hole 0.9: 1(0,0)
  round 1.6 hole 0.9: 2(2.54,0) 3(5.08,0)
  silkscreen extent -1.27,-1.27 6.35,1.27, body extent -1.27,-1.27 6.35,1.27, height 8.62
HDR_1X6_100MILL [mm] "SINGLE ROW 6 PIN HDR 2.54MM"
  rect 1.6x1.6 hole 0.9: 1(0,0)
  round 1.6 hole 0.9: 2(2.54,0) 3(5.08,0) 4(7.62,0) 5(10.16,0) 6(12.7,0)
  silkscreen extent -1.27,-1.27 13.97,1.27, body extent -1.27,-1.27 13.97,1.27, height 7.54
HRS_DM3BT-DSF-PEJS [mm]
  rect 0.7x1.4 smd: 1(-2.85,7.45) 2(-1.75,7.45) 3(-0.65,7.45) 4(0.45,7.45) 5(1.55,7.45) 6(2.65,7.45) 7(3.75,7.45) 8(4.85,7.45)
  rect 1x1.4 smd: S1(-4.75,7.45)
  rect 1.2x1.2 smd: S2(6.65,3.25)
  rect 1.2x3.2 smd: S3(6.65,-6.55)
  rect 1.5x1.9 smd paste-2 mask+0: S4(-6.65,-7.55)
  rect 1.2x0.8 smd: SW-A(6.65,-2.95)
  rect 0.7x1.2 smd: SW-B(5.8,7.55)
  Top Layer region: -5.9,-7.85 -5.75,-8 -5.4,-8 -5.4,-8.5 -7.4,-8.5 -7.4,-6.6 -5.9,-6.6
  Keep-Out Layer region: 7.15,3.85 6.4,3.85 6.4,7.1 7.15,7.1
  Keep-Out Layer region: 7.15,-0.95 6.4,-0.95 6.4,2.65 7.15,2.65
  Keep-Out Layer region: 7.15,3.85 6.4,3.85 6.4,7.1 7.15,7.1
  Keep-Out Layer region: 7.15,-0.95 6.4,-0.95 6.4,2.65 7.15,2.65
  silkscreen extent -7,-8.4 6.85,8.9, body extent -7,-9.9 6.85,7.65, height 1.85
IND_SDR0403 [mm] "INDUCTOR BOURNS SDR0403 SERIES"
  rect 4.5x1.8 smd: 1(0,1.65) 2(0,-1.65)
  silkscreen extent -3,-0.25 2,2, body extent -2.25,-2.2 2.25,2.2, height 3.25
INDPM5552X200N [mm]
  rect 2.05x2.7 smd: 1(-2.35,0) 2(2.35,0)
  silkscreen extent -2.75,-2.59 2.75,2.59, body extent -2.73,-2.54 2.73,2.61, height 1.95
LPS4018 [mm] "COIL CRAFT LPS4018 INDUCTOR SERIES"
  rect 1.45x3.89 smd: 5(-1.475,0) 6(1.475,0)
  body extent -1.99,-1.99 1.99,1.99, height 1.8
MICRO_USB_AB_MOLEX_0475900001 [mm] "MICRO USB AB MOLEX 0475900001"
  rect 0.4x1.35 smd: 1(-2.875,2.675) 2(-3.525,2.675) 3(-4.175,2.675) 4(-4.825,2.675) 5(-5.475,2.675)
  oval 1x1.9 hole 0.6 slot 1.3 at 90 deg: S1(0,0) S4(-8.35,0)
  oval 1.05x1.25 hole 0.65 slot 0.85 at 90 deg: S2(-1.95,2.675) S3(-6.4,2.675)
  rect 2.9x1.9 smd: S5(-4.175,0)
  silkscreen extent -7.75,-2.15 -0.5,-2.15, body extent -8.52,-2.86 0.12,3.03, height 2.76
MT_HOLE_3MM_5MM [mm] "3MM ID / 5MM OD"
  round 5 hole 3: 1(0,0)
OSC_ECS-2520S25-250-FN-TR [mm]
  rect 0.9x0.8 smd: 1(-0.925,-0.725) 2(0.925,-0.725) 3(0.925,0.725) 4(-0.925,0.725)
  silkscreen extent -2,-1 0.22,1, body extent -1.6,-1.25 1.6,1.25, height 0.83
PMG_LTST-C170GKT [mil] "LTST-C170GKT"
  rect 60x50 smd far side: 1(-43.78,0) 2(43.78,0)
  body extent -60,-30 65,30, height 43
PMG_NX3DV221TKX [mm] "SWDAT_IC USB 2.0 SWITCH HS 10HVSON"
  rect 0.55x0.23 smd: 1(-1.425,1) 2(-1.425,0.5) 3(-1.425,0) 4(-1.425,-0.5) 5(-1.425,-1) 6(1.425,-1) 7(1.425,-0.5) 8(1.425,0) 9(1.425,0.5) 10(1.425,1)
  rect 1.6x2 smd paste-2: 11(0,0)
  silkscreen extent -2.35,-1.5 1.5,1.5, body extent -1.5,-1.5 1.5,1.5, height 0.85
PMG_RES_0805 [mil]
  rect 60x50 smd: 1(-43.78,0) 2(43.78,0)
  silkscreen extent -94,-43 94,42, body extent -61,-30 61,31, height 22
QFP50P2600X2600X160-176N [mm]
  rrect25% 1.49x0.28 smd: 1(-12.67,10.75) 2(-12.67,10.25) 3(-12.67,9.75) 4(-12.67,9.25) 5(-12.67,8.75) 6(-12.67,8.25) 7(-12.67,7.75) 8(-12.67,7.25) 9(-12.67,6.75) 10(-12.67,6.25) 11(-12.67,5.75) 12(-12.67,5.25) 13(-12.67,4.75) 14(-12.67,4.25) 15(-12.67,3.75) 16(-12.67,3.25) 17(-12.67,2.75) 18(-12.67,2.25) 19(-12.67,1.75) 20(-12.67,1.25) 21(-12.67,0.75) 22(-12.67,0.25) 23(-12.67,-0.25) 24(-12.67,-0.75) 25(-12.67,-1.25) 26(-12.67,-1.75) 27(-12.67,-2.25) 28(-12.67,-2.75) 29(-12.67,-3.25) 30(-12.67,-3.75) 31(-12.67,-4.25) 32(-12.67,-4.75) 33(-12.67,-5.25) 34(-12.67,-5.75) 35(-12.67,-6.25) 36(-12.67,-6.75) 37(-12.67,-7.25) 38(-12.67,-7.75) 39(-12.67,-8.25) 40(-12.67,-8.75) 41(-12.67,-9.25) 42(-12.67,-9.75) 43(-12.67,-10.25) 44(-12.67,-10.75) 89(12.67,-10.75) 90(12.67,-10.25) 91(12.67,-9.75) 92(12.67,-9.25) 93(12.67,-8.75) 94(12.67,-8.25) 95(12.67,-7.75) 96(12.67,-7.25) 97(12.67,-6.75) 98(12.67,-6.25) 99(12.67,-5.75) 100(12.67,-5.25) 101(12.67,-4.75) 102(12.67,-4.25) 103(12.67,-3.75) 104(12.67,-3.25) 105(12.67,-2.75) 106(12.67,-2.25) 107(12.67,-1.75) 108(12.67,-1.25) 109(12.67,-0.75) 110(12.67,-0.25) 111(12.67,0.25) 112(12.67,0.75) 113(12.67,1.25) 114(12.67,1.75) 115(12.67,2.25) 116(12.67,2.75) 117(12.67,3.25) 118(12.67,3.75) 119(12.67,4.25) 120(12.67,4.75) 121(12.67,5.25) 122(12.67,5.75) 123(12.67,6.25) 124(12.67,6.75) 125(12.67,7.25) 126(12.67,7.75) 127(12.67,8.25) 128(12.67,8.75) 129(12.67,9.25) 130(12.67,9.75) 131(12.67,10.25) 132(12.67,10.75)
  rrect25% 0.28x1.49 smd: 45(-10.75,-12.67) 46(-10.25,-12.67) 47(-9.75,-12.67) 48(-9.25,-12.67) 49(-8.75,-12.67) 50(-8.25,-12.67) 51(-7.75,-12.67) 52(-7.25,-12.67) 53(-6.75,-12.67) 54(-6.25,-12.67) 55(-5.75,-12.67) 56(-5.25,-12.67) 57(-4.75,-12.67) 58(-4.25,-12.67) 59(-3.75,-12.67) 60(-3.25,-12.67) 61(-2.75,-12.67) 62(-2.25,-12.67) 63(-1.75,-12.67) 64(-1.25,-12.67) 65(-0.75,-12.67) 66(-0.25,-12.67) 67(0.25,-12.67) 68(0.75,-12.67) 69(1.25,-12.67) 70(1.75,-12.67) 71(2.25,-12.67) 72(2.75,-12.67) 73(3.25,-12.67) 74(3.75,-12.67) 75(4.25,-12.67) 76(4.75,-12.67) 77(5.25,-12.67) 78(5.75,-12.67) 79(6.25,-12.67) 80(6.75,-12.67) 81(7.25,-12.67) 82(7.75,-12.67) 83(8.25,-12.67) 84(8.75,-12.67) 85(9.25,-12.67) 86(9.75,-12.67) 87(10.25,-12.67) 88(10.75,-12.67) 133(10.75,12.67) 134(10.25,12.67) 135(9.75,12.67) 136(9.25,12.67) 137(8.75,12.67) 138(8.25,12.67) 139(7.75,12.67) 140(7.25,12.67) 141(6.75,12.67) 142(6.25,12.67) 143(5.75,12.67) 144(5.25,12.67) 145(4.75,12.67) 146(4.25,12.67) 147(3.75,12.67) 148(3.25,12.67) 149(2.75,12.67) 150(2.25,12.67) 151(1.75,12.67) 152(1.25,12.67) 153(0.75,12.67) 154(0.25,12.67) 155(-0.25,12.67) 156(-0.75,12.67) 157(-1.25,12.67) 158(-1.75,12.67) 159(-2.25,12.67) 160(-2.75,12.67) 161(-3.25,12.67) 162(-3.75,12.67) 163(-4.25,12.67) 164(-4.75,12.67) 165(-5.25,12.67) 166(-5.75,12.67) 167(-6.25,12.67) 168(-6.75,12.67) 169(-7.25,12.67) 170(-7.75,12.67) 171(-8.25,12.67) 172(-8.75,12.67) 173(-9.25,12.67) 174(-9.75,12.67) 175(-10.25,12.67) 176(-10.75,12.67)
  silkscreen extent -14.46,-12.05 12.05,12.05, body extent -12.89,-12.89 12.89,12.89, height 1.55
RES_0603#1 [mm] "RES 0603 .125W"
  rrect22% 0.89x0.93 smd: 1(-0.77,0) 2(0.77,0)
  silkscreen extent -0.76,-0.76 0.76,0.76, body extent -0.8,-0.43 0.8,0.43, height 0.48
RES_0603#2 [mm] "RES 0603 .125W"
  rrect22% 0.89x0.93 smd far side: 1(-0.77,0) 2(0.77,0)
  body extent -0.8,-0.43 0.8,0.43, height 0.48
RES_0805#1 [mil]
  rect 60x50 smd far side: 1(-43.78,0) 2(43.78,0)
  body extent -61,-118 61,30, height 43
RES_0805#2 [mil]
  rect 60x50 smd: 1(-43.78,0) 2(43.78,0)
  silkscreen extent -94,-43 94,42, body extent -61,-30 61,118, height 43
SC70-5_SOT-353_5-TSSOP [mm] "COMMON NAMES: SC70-5, SOT-353, 5-TSSOP"
  rrect50% 1.19x0.4 smd: 1(-0.96,0.65) 2(-0.96,0) 3(-0.96,-0.65) 4(0.96,-0.65) 5(0.96,0.65)
  silkscreen extent -2.17,-1.22 0.68,1.24, body extent -1.1,-1 1.1,1, height 0.93
SMB [mm] "DIODE SCHOTTKY 40V 1A SMB"
  rect 2.159x2.743 smd: 1(-2.21,0) 2(2.21,0)
  silkscreen extent -3.8,-2 4.1,2, body extent -3,-2 3,2, height 2.31
SO8W [mm] "8 Pin SOP2 (SO8W) 5mm x 5mm"
  rrect25% 1.61x0.58 smd: 1(-3.605,1.905) 2(-3.605,0.635) 3(-3.605,-0.635) 4(-3.605,-1.905) 5(3.605,-1.905) 6(3.605,-0.635) 7(3.605,0.635) 8(3.605,1.905)
  silkscreen extent -5.31,-2.75 2.75,2.75, body extent -4.05,-2.73 4.05,2.73, height 1.75
SO-8 [mm] "SO8 IC"
  rrect25% 1.91x0.57 smd: 1(-2.41,1.905) 2(-2.41,0.635) 3(-2.41,-0.635) 4(-2.41,-1.905) 5(2.41,-1.905) 6(2.41,-0.635) 7(2.41,0.635) 8(2.41,1.905)
  silkscreen extent -4.42,-2.51 1.95,2.57, body extent -2.89,-2.5 2.89,2.4, height 1.45
SOD123 [mm] "SOD123"
  rect 1.6x0.8 smd: 1(-1.7,0) 2(1.7,0)
  silkscreen extent -1.45,-0.85 1.45,0.85, body extent -1.85,-0.8 1.85,0.8, height 1.27
SOD323 [mm] "SOD323"
  rect 0.8x0.9 smd: 1(1.15,0) 2(-1.15,0)
  silkscreen extent -2.2,-0.77 0.85,0.77, body extent -1.3,-0.67 1.3,0.68, height 1.1
SOT-23 [mm] "SOT23-3"
  rect 0.9x0.95 smd: 1(-0.95,-1.175) 2(0.95,-1.175) 3(0,1.175)
  silkscreen extent -2.03,-1.39 1.3,1.18, body extent -1.5,-1.25 1.5,1.25, height 1.05
SOT-363_6-TSSOP_SC-88 [mm] "COMMON NAMES: SOT-363, 6-TSSOP, SC-88"
  rect 0.95x0.4 smd: 1(-1.1,0.65) 2(-1.1,0) 3(-1.1,-0.65) 4(1.1,-0.65) 5(1.1,0) 6(1.1,0.65)
  silkscreen extent -1.24,-1 0.3,1.34, body extent -1.2,-1.1 1.2,1.1, height 1.1
SW_EVQ-Q2U02W [mm] "SWITCH"
  rect 3.2x1 smd: 1(-3.4,2) 2(3.4,2) 3(-3.4,-2) 4(3.4,-2)
  silkscreen extent -4.4,-3 3.25,3.1, body extent -3.25,-3 3.25,3, height 2.3
TC2030-MCP-NL- [mm] "CABLE TAG-CONNECT IN-CIRCUIT"
  rect 0.787x0.787 smd: 1(-1.27,-0.635)
  round 0.787 smd: 2(-1.27,0.635) 3(0,-0.635) 4(0,0.635) 5(1.27,-0.635) 6(1.27,0.635)
  oval 1x0.991 hole 1 unplated: 7(-2.54,0)
  round 1 hole 1 unplated: 8(2.54,1.016) 9(2.54,-1.016)
  silkscreen extent -5.08,-3.05 5.08,3.05
WRL-17146 [mil] "ESP8266 WIFI MODULE"
  rect 60x60 hole 35: 1(0,0)
  round 60 hole 35: 2(-100,0) 3(0,-100) 4(-100,-100) 5(0,-200) 6(-100,-200) 7(0,-300) 8(-100,-300)
  silkscreen extent -167,-435 817,135, body extent -163,-433 813,138, height 231
XDCR_LIS3DHTR [mm]
  rect 0.9x0.35 smd paste-1 mask+0: 1(0,0) 2(0,-0.5) 3(0,-1) 4(0,-1.5) 5(0,-2) 9(2.45,-2) 10(2.45,-1.5) 11(2.45,-1) 12(2.45,-0.5) 13(2.45,0)
  rect 0.35x0.9 smd paste-1 mask+0: 6(0.725,-2.225) 7(1.225,-2.225) 8(1.725,-2.225) 14(1.725,0.225) 15(1.225,0.225) 16(0.725,0.225)
  silkscreen extent -0.85,-2.5 2.72,0.6, body extent -0.27,-2.5 2.73,0.5, height 1.01
XTAL_ECS [mm] "CRYSTAL ECS SERIES"
  rect 1.8x1.8 smd: 1(-4.7,-1.75) 2(4.7,-1.75) 3(4.7,1.75) 4(-4.7,1.75)
  silkscreen extent -6.85,-2.3 6.25,2.3, body extent -6.25,-2.3 6.25,2.3, height 3.7